# Altium PCB 20120404_ind_pcb_small.PcbDoc
Units mm, origin at the board's own origin, x right, y up, seen from the top; angles counter-clockwise.
Board outline 74 x 62 mm, 2 copper layers (Top, Bottom); 81 components, 72 nets, 218 pads, 104 vias.
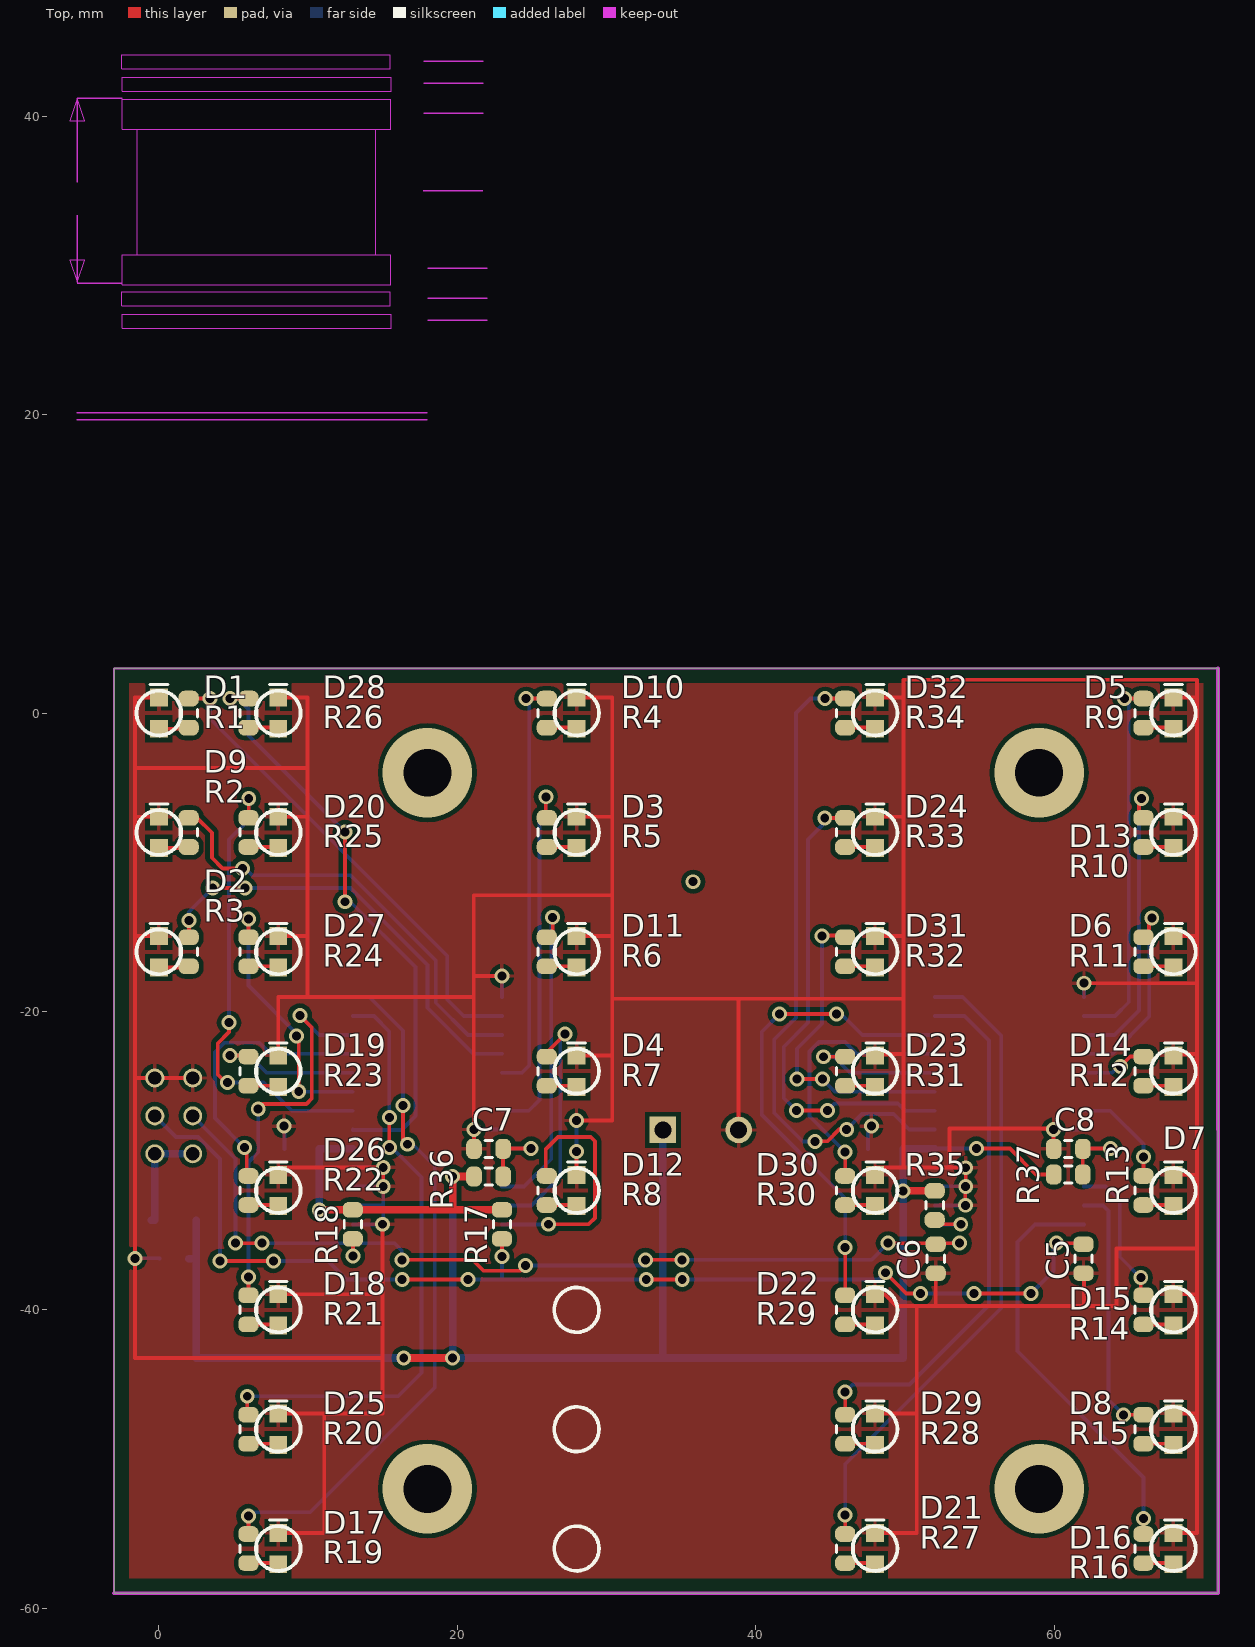
[diagram p0: Top view]
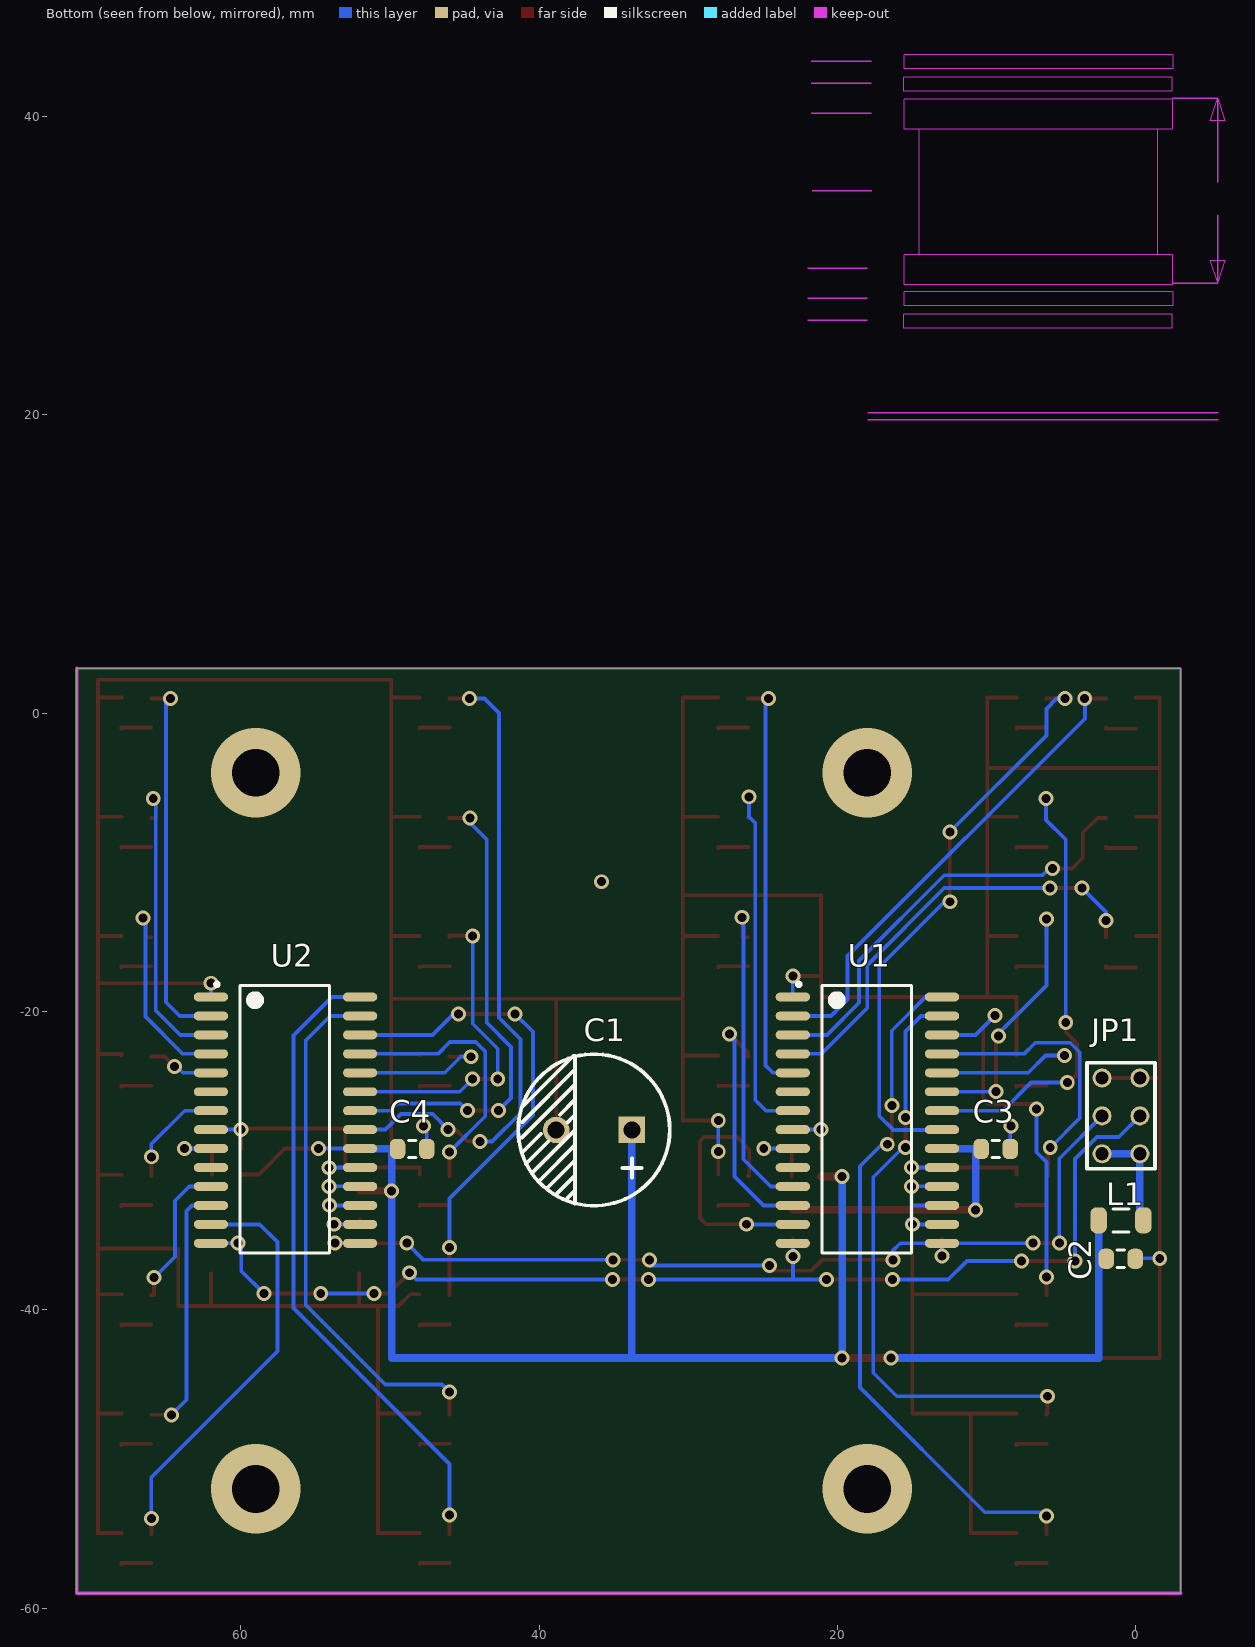
[diagram p1: Bottom view, seen from below]

## Layer stack, top to bottom
Top: signal copper 0.0356
Dielectric: core 0.32, FR-4, Dk 4.8
Bottom: signal copper 0.0356

## Board outline
-3,-59.001 71,-58.999 71,3 -3,3

## Design rules (kind name [scope] priority, off if disabled: settings)
Clearance Poly [InPolygonClass(MyPoly)] p1: gap=0.3
Clearance [All] p2: gap=0.178
Clearance Keepout [(All AND OnLayer('Keep-Out Layer'))] p3: gap=0
PlaneClearance [All] p1: clearance=0
PolygonConnect PolygonConnect_2 [IsPolygon And InNet('GND') And OnLayer('Top Layer, Top') vs IsVia] p1: connectstyle=Direct reliefconductorwidth=0 reliefentries=4 polygonreliefangle="90 Angle"
PolygonConnect PolygonConnect_1 [IsPolygon And InNet('GND') And OnLayer('Top Layer, Top') vs IsPad] p2: connectstyle=Direct reliefconductorwidth=0 reliefentries=4 polygonreliefangle="90 Angle"
PolygonConnect [All] p3: connectstyle=Relief reliefconductorwidth=0.254 reliefentries=4 polygonreliefangle="90 Angle"
RoutingVias [All] p1: holewidth=0.6 width=1 viastyle="Through Hole" minholewidth=0.6 minwidth=1 maxholewidth=0.6 maxwidth=1
SilkscreenOverComponentPads [All] p1: minsilkscreentomaskgap=0.254
SolderMaskExpansion [All] p1: expansion=0.102
Width [All] p1: maxlimit=2.54 minlimit=0.254 preferedwidth=0.254
26 further rules are at their usual default settings.

## Classes and differential pairs
polygon class MyPoly: GND

## Components (designator, comment, footprint, x,y, rotation, side; value= is the part's Value field where it differs from the comment)
C1 "100u" CEH12.5D10P5.0 36.322,-27.94 r0 bottom
C2 "10u" RC0805 1.016,-36.576 r180 bottom
C3 "100n" RC0805 9.398,-29.21 r180 bottom
C4 "100n" RC0805 48.514,-29.21 r180 bottom
C5 "100p" RC0805 61.976,-36.576 r270 top
C6 "100p" RC0805 52.07,-36.576 r270 top
C7 "33p" RC0805 22.098,-29.21 r180 top
C8 "33p" RC0805 60.96,-29.21 r180 top
D1 "RED" LED0805 0,0 r90 top
D2 "RED" LED0805 0,-16 r90 top
D3 "RED" LED0805 28,-8 r90 top
D4 "RED" LED0805 28,-24 r90 top
D5 "RED" LED0805 68,0 r90 top
D6 "RED" LED0805 68,-16 r90 top
D7 "RED" LED0805 68,-32 r90 top
D8 "RED" LED0805 68,-48 r90 top
D9 "RED" LED0805 0,-8 r90 top
D10 "RED" LED0805 28,0 r90 top
D11 "RED" LED0805 28,-16 r90 top
D12 "RED" LED0805 28,-32 r90 top
D13 "RED" LED0805 68,-8 r90 top
D14 "RED" LED0805 68,-24 r90 top
D15 "RED" LED0805 68,-40 r90 top
D16 "RED" LED0805 68,-56 r90 top
D17 "RED" LED0805 8,-56 r90 top
D18 "RED" LED0805 8,-40 r90 top
D19 "RED" LED0805 8,-24 r90 top
D20 "RED" LED0805 8,-8 r90 top
D21 "RED" LED0805 48,-56 r90 top
D22 "RED" LED0805 48,-40 r90 top
D23 "RED" LED0805 48,-24 r90 top
D24 "RED" LED0805 48,-8 r90 top
D25 "RED" LED0805 8,-48 r90 top
D26 "RED" LED0805 8,-32 r90 top
D27 "RED" LED0805 8,-16 r90 top
D28 "RED" LED0805 8,0 r90 top
D29 "RED" LED0805 48,-48 r90 top
D30 "RED" LED0805 48,-32 r90 top
D31 "RED" LED0805 48,-16 r90 top
D32 "RED" LED0805 48,0 r90 top
JP1 "Header 3X2 2.54mm" Pins2x3_2.54mm 1,-27 r0 bottom
L1 "BLM31PG601SN1" RC1206 1,-34 r180 bottom
R1 "510R" RC0805 2,0 r90 top
R2 "510R" RC0805 2,-8 r90 top
R3 "510R" RC0805 2,-16 r90 top
R4 "510R" RC0805 26,0 r90 top
R5 "510R" RC0805 26,-8 r90 top
R6 "510R" RC0805 26,-16 r90 top
R7 "510R" RC0805 26,-24 r90 top
R8 "510R" RC0805 26,-32 r90 top
R9 "510R" RC0805 66,0 r90 top
R10 "510R" RC0805 66,-8 r90 top
R11 "510R" RC0805 66,-16 r90 top
R12 "510R" RC0805 66,-24 r90 top
R13 "510R" RC0805 66,-32 r90 top
R14 "510R" RC0805 66,-40 r90 top
R15 "510R" RC0805 66,-48 r90 top
R16 "510R" RC0805 66,-56 r90 top
R17 "5.1k" RC0805 23,-34.27 r270 top
R18 "5.1k" RC0805 13,-34.27 r270 top
R19 "510R" RC0805 6,-56 r270 top
R20 "510R" RC0805 6,-48 r270 top
R21 "510R" RC0805 6,-40 r270 top
R22 "510R" RC0805 6,-32 r270 top
R23 "510R" RC0805 6,-24 r270 top
R24 "510R" RC0805 6,-16 r270 top
R25 "510R" RC0805 6,-8 r270 top
R26 "510R" RC0805 6,0 r270 top
R27 "510R" RC0805 46,-56 r270 top
R28 "510R" RC0805 46,-48 r270 top
R29 "510R" RC0805 46,-40 r270 top
R30 "510R" RC0805 46,-32 r270 top
R31 "510R" RC0805 46,-24 r270 top
R32 "510R" RC0805 46,-16 r270 top
R33 "510R" RC0805 46,-8 r270 top
R34 "510R" RC0805 46,0 r270 top
R35 "5.1k" RC0805 52,-33 r90 top
R36 "3k9" RC0805 22.098,-31.055 r0 top
R37 "3k9" RC0805 60.956,-30.921 r0 top
U1 "PartName" SO-28 23,-33 r180 bottom
U2 "PartName" SO-28 62,-33 r180 bottom

## Footprints (in the part's own frame and the unit in brackets; to place one, negate y for a bottom-side part, rotate by r counter-clockwise, add the part's x,y. Pads: shape width x height; smd on the part's side, far side on the other; paste and mask are expansions set on the pad)
CEH12.5D10P5.0 [mil] "Electrolytic capacitor 12.5x10x5 mm"
  rect 70x70 hole 45: 1(-100,0)
  round 70 hole 45: 2(100,0)
  silkscreen extent -200,-200 200,200, body extent -196,-196 196,196, height 492
LED0805 [mm] "Molded Diode, 2-Leads, Body 2.0x1.3mm, IPC Medium Density"
  rect 1.2x1.2 smd: 1(1.05,0) 2(-1.05,0)
  silkscreen extent 1.9,-0.6 1.9,0.6, body extent -1,-0.62 1,0.63, height 0.8
Pins2x3_2.54mm [mil] "Pins2x3_2.54mm"
  round 50 hole 35: 1(-50,100) 2(50,100) 3(-50,0) 4(50,0) 5(-50,-100) 6(50,-100)
  silkscreen extent -89,-140 90,139, body extent -89,-140 90,140, height 39
RC0805 [mm] "Chip Resistor, 2-Leads, Body 2.0x1.3mm, IPC Medium Density"
  rrect75% 1.05x1.35 smd: 1(-0.975,0) 2(0.975,0)
  silkscreen extent -0.25,-0.58 0.25,0.58, body extent -1.05,-0.67 1.05,0.67, height 0.6
RC1206 [mm] "Chip Resistor, 2-Leads, Body 3.1x1.6mm, IPC Medium Density"
  rrect75% 1.1x1.75 smd: 1(-1.5,0) 2(1.5,0)
  silkscreen extent -0.55,-0.77 0.55,0.77, body extent -1.6,-0.85 1.6,0.85, height 0.65
SO-28 [mm] "SOIC, 20-Leads, Body 13,0x7,6mm (max), Pitch 1,27mm, IPC Medium Density"
  oval 2.3x0.6 smd: 1(0,13.97) 2(0,12.7) 3(0,11.43) 4(0,10.16) 5(0,8.89) 6(0,7.62) 7(0,6.35) 8(0,5.08) 9(0,3.81) 10(0,2.54) 11(0,1.27) 12(0,0) 13(0,-1.27) 14(0,-2.54) 15(10,-2.54) 16(10,-1.27) 17(10,0) 18(10,1.27) 19(10,2.54) 20(10,3.81) 21(10,5.08) 22(10,6.35) 23(10,7.62) 24(10,8.89) 25(10,10.16) 26(10,11.43) 27(10,12.7) 28(10,13.97)
  silkscreen extent 0.28,-3.2 7.95,14.94, body extent 1.14,-3.2 8.75,14.75, height 2.65

## Part data
C1: library part CEH12.5D10P5.0M-50V-100U, "Electrolytic capacitor"
C2: library part CC0805K-X7R-16V0-10U0, "Chip capacitor, 20p"
C3 C4: library part CC0805K-X5R-50V0-100N, "Chip capacitor, 20p"
C5 C6: library part CC0805K-X5R-50V0-100P, "Chip capacitor, 20p"
C7 C8: library part CC0805K-X5R-50V0-33P0, "Chip capacitor, 20p"
D1 D2 D3 D4 D5 D6 D7 D8 D9 D10 D11 D12 D13 D14 D15 D16 D17 D18 D19 D20 D21 D22 D23 D24 D25 D26 D27 D28 D29 D30 D31 D32: library part HSMC-C170, "High Performance ChipLED / 0805"
L1: "Ferrite bead smd"
R1 R2 R3 R4 R5 R6 R7 R8 R9 R10 R11 R12 R13 R14 R15 R16 R19 R20 R21 R22 R23 R24 R25 R26 R27 R28 R29 R30 R31 R32 R33 R34: library part RC0805F-510R, "Chip resistor"
R17 R18 R35: library part RC0805F-5K10, "Chip resistor"
R36 R37: library part RC0805F-3K90, "Chip resistor"
U1 U2: library part MCP23016-I/SO, "16-Bit I2C™ I/O Expander"

## Via types
v1: diameter 1, hole 0.6, Top to Bottom, tented top, 100 vias
v2: diameter 6, hole 3.2, Top to Bottom, tented top, 4 vias

## Nets (pads, with @x,y where several pads share a name; then routed paths per layer and width w, separated by ;. In a path a pad name is that pad's centre, name@x,y a point inside that pad or via, vN(x,y) a via of type N, cw(c..) or ccw(c..) an arc to the next point about the centre after c; other vN are vias at no path point)
+5VD: C1.1 C2.1 C3.1 C4.1 L1.1 R17.1 R18.1 R35.2 R36.1 R37.1 U1.20 U2.20 | length 139.1
  Top w0.254: v1(54.791,-29.181) 54.842,-29.181 54.842,-29.19 57.048,-29.19 58.779,-30.921 R37.1
  Top w0.508: v1(10.747,-33.296) R18.1 19.688,-33.295 ; v1(16.412,-43.227) v1(19.688,-43.227) ; R36.1 21.123,-31.06 v1(19.688,-31.06) 19.688,-33.295 ; R17.1 19.688,-33.295 ; v1(49.889,-32.026) R35.2
  Bottom w0.254: C4.1@49.889,-29.282 C4.1@49.889,-29.19 ; U2.20 52,-29.181 v1(54.791,-29.181)
  Bottom w0.508: C2.1 2.5,-36.576 L1.1 2.5,-43.227 11.408,-43.227 v1(16.412,-43.227) ; v1(10.747,-33.296) 10.747,-29.19 U1.20 ; v1(19.688,-31.06) v1(19.688,-43.227) 36.478,-43.227 ; C1.1 33.782,-43.227 36.478,-43.227 ; C4.1@49.889,-29.282 v1(49.889,-32.026) 49.889,-43.227 36.478,-43.227 ; C4.1@49.889,-29.19 U2.20
+5VD_I2C: JP1.1 JP1.2 L1.2 | length 7.2
  Bottom w0.508: L1.2 -0.27,-34 JP1.1 JP1.2
CLK_1: C7.1 R36.2 U1.9 | length 5.7
  Top w0.254: R36.2 C7.1 23.073,-29.181 v1(24.946,-29.181)
  Bottom w0.254: U1.9 24.946,-29.19 v1(24.946,-29.181)
CLK_2: C8.1 R37.2 U2.9 | length 5.4
  Top w0.254: R37.2 61.931,-29.21 C8.1 61.935,-29.181 v1(63.783,-29.181)
  Bottom w0.254: U2.9 63.783,-29.19 v1(63.783,-29.181)
DGND: C1.2 C2.2 C3.2 C4.2 C5.2 C6.2 C7.2 C8.2 D1.1 D2.1 D3.1 D4.1 D5.1 D6.1 D7.1 D8.1 D9.1 D10.1 D11.1 D12.1 D13.1 D14.1 D15.1 D16.1 D17.1 D18.1 D19.1 D20.1 D21.1 D22.1 D23.1 D24.1 D25.1 D26.1 D27.1 D28.1 D29.1 D30.1 D31.1 D32.1 JP1.5 JP1.6 U1.1 U1.8 U1.16 U1.17 U1.18 U1.19 U2.1 U2.8 U2.17 U2.18 U2.19 | length 508.6
  Top w0.254: D2.1 -1.597,-14.95 ; D9.1 -1.597,-6.95 ; D1.1 -1.597,1.05 -1.597,-3.679 ; JP1.6 -1.597,-24.46 ; D17.1 11.078,-54.95 11.078,-46.95 ; D25.1 11.078,-46.95 ; D18.1 14.989,-38.95 ; D26.1 8,-30.46 v1@15.04,-30.46 ; D19.1 8,-19.03 9.96,-19.03 ; D27.1 9.96,-14.95 ; D20.1 9.96,-6.95 ; D28.1 9.96,1.05 9.96,-3.679 ; v1(14.989,-34.261) 14.989,-38.95 ; v1(15.04,-31.721) v1@15.04,-30.46 ; v1(15.04,-30.451) v1@15.04,-30.46 ; C7.2 21.123,-27.911 v1(21.111,-27.911) 21.111,-19.03 ; v1(22.99,-17.624) 21.111,-17.624 ; v1(27.994,-29.384) 28,-29.384 D12.1 ; v1(27.994,-27.301) 30.382,-27.301 30.382,-22.95 ; D4.1 30.382,-22.95 ; D11.1 30.382,-14.95 ; D3.1 30.382,-6.95 ; D10.1 30.382,1.05 30.382,-6.95 ; C1.2 38.856,-27.94 38.856,-19.148 ; D21.1 50.803,-54.95 50.803,-46.95 ; D29.1 50.803,-46.95 ; D22.1 48.638,-38.95 49.435,-39.747 50.803,-39.747 ; D30.1 48,-30.46 49.914,-30.46 ; D23.1 48,-22.856 49.914,-22.856 ; D31.1 49.914,-14.95 ; D24.1 49.914,-6.95 ; D32.1 49.914,1.05 ; C6.2 52.07,-39.747 ; v1(54.054,-32.991) 54.054,-31.721 v1(54.08,-31.721) v1(54.08,-30.476) v1@54.08,-30.46 ; C8.2 59.973,-29.21 v1(59.973,-27.911) 59.973,-27.835 53,-27.835 53,-30.451 54.08,-30.451 v1@54.08,-30.46 ; C5.2 62,-37.551 62,-39.747 ; v1(62.005,-18.106) 69.574,-18.106 ; D16.1 69.574,-54.95 69.574,-46.95 ; D8.1 69.574,-46.95 ; D15.1 69.574,-38.95 ; D7.1 69.574,-30.95 ; D14.1 68,-22.856 69.574,-22.856 ; D6.1 69.574,-14.95 ; D13.1 69.574,-6.95 ; D5.1 69.574,1.05 ; -1.597,-24.46 -1.597,-14.95 ; -1.597,-24.46 v1(-1.597,-36.547) -1.597,-43.227 14.989,-43.227 ; -1.597,-14.95 -1.597,-6.95 ; -1.597,-6.95 -1.597,-3.679 ; -1.597,-3.679 9.96,-3.679 ; 9.96,-19.03 21.111,-19.03 ; 9.96,-19.03 9.96,-14.95 ; 9.96,-14.95 9.96,-6.95 ; 9.96,-6.95 9.96,-3.679 ; 11.078,-46.95 14.989,-46.95 14.989,-43.227 ; 14.989,-43.227 14.989,-38.95 ; 21.111,-19.03 21.111,-17.624 ; 21.111,-17.624 21.111,-12.214 30.382,-12.214 ; 30.382,-22.95 30.382,-19.148 ; 30.382,-19.148 30.382,-14.95 ; 30.382,-19.148 38.856,-19.148 ; 30.382,-14.95 30.382,-12.214 ; 30.382,-12.214 30.382,-6.95 ; 38.856,-19.148 49.914,-19.148 ; 49.914,-30.46 v1@54.08,-30.46 ; 49.914,-30.46 49.914,-22.856 ; 49.914,-22.856 49.914,-19.148 ; 49.914,-19.148 49.914,-14.95 ; 49.914,-14.95 49.914,-6.95 ; 49.914,-6.95 49.914,1.05 ; 49.914,1.05 49.914,2.239 69.574,2.239 69.574,1.05 ; 50.803,-46.95 50.803,-39.747 ; 50.803,-39.747 52.07,-39.747 ; 52.07,-39.747 62,-39.747 ; 62,-39.747 64.196,-39.747 64.196,-35.886 69.574,-35.886 ; 69.574,-46.95 69.574,-38.95 ; 69.574,-38.95 69.574,-35.886 ; 69.574,-35.886 69.574,-30.95 ; 69.574,-30.95 69.574,-22.856 ; 69.574,-22.856 69.574,-18.106 ; 69.574,-18.106 69.574,-14.95 ; 69.574,-14.95 69.574,-6.95 ; 69.574,-6.95 69.574,1.05
  Bottom w0.254: v1(-1.597,-36.547) 0.041,-36.547 C2.2 ; v1@8.382,-27.94 8.423,-27.981 C3.2 ; U1.16 v1@14.989,-34.27 ; U1.17 15.04,-33 ; U1.18 13,-31.721 v1(15.04,-31.721) 15.04,-33 ; U1.19 15.04,-30.46 v1(15.04,-30.451) ; v1(14.989,-34.261) v1@14.989,-34.27 ; v1(21.111,-27.911) 23,-27.911 U1.8 ; v1(22.99,-17.624) 23,-17.624 U1.1 ; v1(27.994,-29.384) v1(27.994,-27.301) ; C4.2 47.539,-28.153 47.752,-27.94 v1(47.752,-27.686) ; U2.17 54.054,-33 v1(54.054,-32.991) ; U2.18 52,-31.721 v1(54.08,-31.721) ; U2.19 54.08,-30.46 v1(54.08,-30.476) ; v1(59.973,-27.911) 59.973,-27.92 U2.8 ; U2.1 62,-18.106 v1(62.005,-18.106) ; v1@14.989,-34.27 15.04,-34.27 15.04,-33
  other v1: 8.382,-27.686
MCU_SCL: C5.1 JP1.3 R17.2 U1.14 U2.14 | length 79.6
  Top w0.254: v1(4.093,-36.725) v1(7.674,-36.725) ; v1(16.31,-37.969) v1(20.73,-37.969) ; v1(22.99,-36.42) 22.99,-35.245 R17.2 ; v1(32.668,-37.969) v1(35.081,-37.969) ; v1(48.695,-37.512) 50.092,-38.909 v1(51.057,-38.909) ; v1(54.639,-38.909) v1(58.449,-38.909) ; v1(60.176,-35.531) 61.976,-35.531 C5.1
  Bottom w0.254: JP1.3 1.149,-28.419 2.619,-28.419 4.093,-29.892 v1(4.093,-36.725) ; v1(7.674,-36.725) 11.332,-36.725 12.576,-37.969 v1(16.31,-37.969) ; v1(20.73,-37.969) 22.99,-37.969 ; U1.14 23,-36.42 v1(22.99,-36.42) 22.99,-37.969 ; v1(32.668,-37.969) 22.99,-37.969 ; v1(35.081,-37.969) 48.238,-37.969 v1(48.695,-37.512) ; v1(51.057,-38.909) v1(54.639,-38.909) ; v1(58.449,-38.909) 59.973,-37.385 59.973,-35.531 v1(60.176,-35.531) 60.176,-35.54 U2.14
MCU_SDA: C6.1 JP1.4 R18.2 U1.15 U2.15 | length 64.2
  Top w0.254: v1(5.134,-35.531) v1(6.912,-35.531) ; R18.2 13.008,-35.245 v1(13.008,-36.394) ; v1(16.285,-36.648) 21.034,-36.648 21.771,-37.385 24.209,-37.385 v1(24.565,-37.029) ; v1(32.617,-36.648) v1(35.055,-36.648) ; v1(48.873,-35.531) C6.1@52.07,-35.531 ; v1(53.673,-35.531) C6.1@52.07,-35.531 ; C6.1@52.07,-35.531 C6.1 C6.1@52.07,-35.531
  Bottom w0.254: JP1.4 5.137,-29.867 5.137,-35.531 v1(5.134,-35.531) ; v1(6.912,-35.531) 13,-35.531 U1.15 ; v1(13.008,-36.394) 13,-36.394 U1.15 ; v1(16.285,-36.648) 16.275,-36.648 16.275,-36.013 15.802,-35.54 U1.15 ; v1(24.565,-37.029) 32.617,-37.029 v1(32.617,-36.648) ; v1(35.055,-36.648) 43.971,-36.648 47.755,-36.648 48.864,-35.54 48.873,-35.54 v1(48.873,-35.531) ; U2.15 53.673,-35.54 v1(53.673,-35.531)
NetD1_2: D1.2 R1.1 | length 2.1
  Top w0.254: D1.2 2,-1.05 R1.1
NetD2_2: D2.2 R3.1 | length 2.1
  Top w0.254: D2.2 2,-17.05 R3.1
NetD3_2: D3.2 R5.1 | length 2.1
  Top w0.254: R5.1 28,-8.975 D3.2
NetD4_2: D4.2 R7.1 | length 2.1
  Top w0.254: R7.1 28,-24.975 D4.2
NetD5_2: D5.2 R9.1 | length 2.1
  Top w0.254: R9.1 68,-0.975 D5.2
NetD6_2: D6.2 R11.1 | length 2.1
  Top w0.254: R11.1 68,-16.975 D6.2
NetD7_2: D7.2 R13.1 | length 2.1
  Top w0.254: R13.1 68,-32.975 D7.2
NetD8_2: D8.2 R15.1 | length 2.1
  Top w0.254: R15.1 68,-48.975 D8.2
NetD9_2: D9.2 R2.1 | length 2.1
  Top w0.254: D9.2 2,-9.05 R2.1
NetD10_2: D10.2 R4.1 | length 2.1
  Top w0.254: R4.1 28,-0.975 D10.2
NetD11_2: D11.2 R6.1 | length 2.1
  Top w0.254: R6.1 28,-16.975 D11.2
NetD12_2: D12.2 R8.1 | length 2.1
  Top w0.254: R8.1 28,-32.975 D12.2
NetD13_2: D13.2 R10.1 | length 2.1
  Top w0.254: R10.1 68,-8.975 D13.2
NetD14_2: D14.2 R12.1 | length 2.1
  Top w0.254: R12.1 68,-24.975 D14.2
NetD15_2: D15.2 R14.1 | length 2.1
  Top w0.254: R14.1 68,-40.975 D15.2
NetD16_2: D16.2 R16.1 | length 2.1
  Top w0.254: R16.1 68,-56.975 D16.2
NetD17_2: D17.2 R19.2 | length 2.1
  Top w0.254: R19.2 8,-56.975 D17.2
NetD18_2: D18.2 R21.2 | length 2.1
  Top w0.254: R21.2 8,-40.975 D18.2
NetD19_2: D19.2 R23.2 | length 2.1
  Top w0.254: R23.2 8,-24.975 D19.2
NetD20_2: D20.2 R25.2 | length 2.1
  Top w0.254: R25.2 8,-8.975 D20.2
NetD21_2: D21.2 R27.2 | length 2.1
  Top w0.254: R27.2 48,-56.975 D21.2
NetD22_2: D22.2 R29.2 | length 2.1
  Top w0.254: R29.2 48,-40.975 D22.2
NetD23_2: D23.2 R31.2 | length 2.1
  Top w0.254: R31.2 48,-24.975 D23.2
NetD24_2: D24.2 R33.2 | length 2.1
  Top w0.254: R33.2 48,-8.975 D24.2
NetD25_2: D25.2 R20.2 | length 2.1
  Top w0.254: R20.2 8,-48.975 D25.2
NetD26_2: D26.2 R22.2 | length 2.1
  Top w0.254: R22.2 8,-32.975 D26.2
NetD27_2: D27.2 R24.2 | length 2.1
  Top w0.254: R24.2 8,-16.975 D27.2
NetD28_2: D28.2 R26.2 | length 2.1
  Top w0.254: R26.2 8,-0.975 D28.2
NetD29_2: D29.2 R28.2 | length 2.1
  Top w0.254: R28.2 48,-48.975 D29.2
NetD30_2: D30.2 R30.2 | length 2.1
  Top w0.254: R30.2 48,-32.975 D30.2
NetD31_2: D31.2 R32.2 | length 2.1
  Top w0.254: R32.2 48,-16.975 D31.2
NetD32_2: D32.2 R34.2 | length 2.1
  Top w0.254: R34.2 48,-0.975 D32.2
NetR1_2: R1.2 U1.2 | length 32.3
  Top w0.254: R1.2 2,0.969 v1(3.432,0.969)
  Bottom w0.254: v1(3.432,0.969) 3.432,0.975 3.423,0.975 3.423,-0.377 19.323,-16.278 19.323,-19.189 20.434,-20.3 U1.2
NetR2_2: R2.2 U1.3 | length 29.7
  Top w0.254: R2.2 2.562,-7.025 3.559,-8.023 3.559,-9.699 4.27,-10.41 v1(5.591,-10.41)
  Bottom w0.254: v1(5.591,-10.41) 5.794,-10.41 6.252,-10.867 12.846,-10.867 18.561,-16.582 18.561,-19.418 20.713,-21.57 U1.3
NetR3_2: R3.2 U1.4 | length 29.6
  Top w0.254: R3.2 2.01,-15.025 v1(2.01,-13.89) ; v1(3.61,-11.731) v1(5.769,-11.731)
  Bottom w0.254: v1(2.01,-13.89) 2,-13.89 2,-13.341 v1(3.61,-11.731) ; v1(5.769,-11.731) 12.846,-11.731 18.003,-16.887 18.003,-19.748 21.094,-22.84 U1.4
NetR4_2: R4.2 U1.5 | length 28.2
  Top w0.254: v1(24.616,0.969) 26,0.969 R4.2
  Bottom w0.254: U1.5 24.336,-24.11 24.819,-23.627 24.819,0.975 24.616,0.975 v1(24.616,0.969)
NetR5_2: R5.2 U1.7 | length 24.8
  Top w0.254: v1(25.937,-5.61) 25.937,-7.025 R5.2
  Bottom w0.254: U1.7 24.794,-26.65 25.514,-25.93 25.514,-7.362 25.926,-6.951 25.926,-5.61 v1(25.937,-5.61)
NetR6_2: R6.2 U1.11 | length 22.1
  Top w0.254: R6.2 26.394,-15.025 v1(26.394,-13.687)
  Bottom w0.254: U1.11 24.48,-31.73 26.301,-29.908 26.301,-13.788 26.398,-13.691 v1(26.394,-13.687)
NetR7_2: R7.2 U1.12 | length 16.4
  Top w0.254: R7.2 26,-22.742 v1(27.232,-21.51)
  Bottom w0.254: U1.12 24.971,-33 26.902,-31.07 26.902,-21.84 v1(27.232,-21.51)
NetR8_2: R8.2 U1.13 | length 17.2
  Top w0.254: R8.2 25.924,-31.025 25.924,-29.244 26.749,-28.419 28.946,-28.419 29.226,-28.698 29.226,-33.842 28.807,-34.261 v1(26.114,-34.261)
  Bottom w0.254: U1.13 26.114,-34.27 v1(26.114,-34.261)
NetR9_2: R9.2 U2.2 | length 25.3
  Top w0.254: v1(64.722,0.969) 66,0.969 R9.2
  Bottom w0.254: U2.2 64.087,-20.3 65.011,-19.376 65.011,0.975 64.722,0.975 v1(64.722,0.969)
NetR10_2: R10.2 U2.3 | length 20.6
  Top w0.254: v1(65.865,-5.711) 65.688,-5.711 65.688,-7.025 R10.2
  Bottom w0.254: U2.3 64.062,-21.57 65.697,-19.935 65.697,-5.711 v1(65.865,-5.711)
NetR11_2: R11.2 U2.4 | length 14
  Top w0.254: R11.2 66.373,-15.025 66.373,-13.738 v1(66.551,-13.738)
  Bottom w0.254: U2.4 63.884,-22.84 66.383,-20.342 66.383,-13.738 v1(66.551,-13.738)
NetR12_2: R12.2 U2.5 | length 4.4
  Top w0.254: v1(64.443,-23.694) 65.112,-23.025 R12.2
  Bottom w0.254: U2.5 63.884,-24.11 64.3,-23.694 v1(64.443,-23.694)
NetR13_2: R13.2 U2.7 | length 7.1
  Top w0.254: v1(65.992,-29.74) 65.992,-31.025 R13.2
  Bottom w0.254: U2.7 63.757,-26.65 66,-28.893 66,-29.74 v1(65.992,-29.74)
NetR14_2: R14.2 U2.11 | length 9.9
  Top w0.254: v1(65.815,-37.842) 65.815,-39.025 R14.2
  Bottom w0.254: U2.11 63.452,-31.73 64.408,-32.686 64.408,-36.445 65.805,-37.842 v1(65.815,-37.842)
NetR15_2: R15.2 U2.12 | length 17.3
  Top w0.254: v1(64.646,-47.037) 66,-47.037 R15.2
  Bottom w0.254: U2.12 63.275,-33 63.646,-33.372 63.646,-46.021 64.65,-47.025 64.65,-47.037 v1(64.646,-47.037)
NetR16_2: R16.2 U2.13 | length 28
  Top w0.254: v1(65.992,-53.971) 65.992,-55.025 R16.2
  Bottom w0.254: U2.13 58.728,-34.27 57.543,-35.455 57.543,-42.77 66,-51.226 66,-53.971 v1(65.992,-53.971)
NetR19_1: R19.1 U1.28 | length 46.8
  Top w0.254: v1(5.998,-53.819) 5.998,-55.025 R19.1 ; v1(16.361,-26.311) 16.361,-28.647 16.615,-28.901 v1(16.666,-28.901)
  Bottom w0.254: v1(5.998,-53.819) 5.998,-53.565 10.138,-53.565 18.494,-45.208 18.494,-30.375 17.021,-28.901 v1(16.666,-28.901) ; U1.28 14.1,-19.03 16.361,-21.291 v1(16.361,-26.311)
NetR20_1: R20.1 U1.27 | length 40.4
  Top w0.254: v1(5.921,-45.792) 5.921,-46.961 6,-46.961 R20.1 ; v1(15.446,-29.13) v1(15.446,-27.098)
  Bottom w0.254: v1(5.921,-45.792) 16.031,-45.792 17.605,-44.218 17.605,-31.111 15.624,-29.13 v1(15.446,-29.13) ; U1.27 14.414,-20.3 15.446,-21.332 v1(15.446,-27.098)
NetR21_1: R21.1 U1.26 | length 26.6
  Top w0.254: v1(5.998,-37.791) 5.998,-39.025 R21.1 ; v1(6.658,-26.539) 6.988,-26.209 9.884,-26.209 10.239,-25.853 10.239,-21.053 v1(9.452,-20.265)
  Bottom w0.254: v1(5.998,-37.791) 6,-37.791 6,-30.093 6.658,-29.435 v1(6.658,-26.539) ; v1(9.452,-20.265) 9.447,-20.27 10.747,-21.57 U1.26
NetR22_1: R22.1 U1.25 | length 19.3
  Top w0.254: v1(5.744,-29.13) 5.591,-29.13 5.591,-29.232 5.896,-29.536 5.896,-31.025 R22.1
  Bottom w0.254: v1(5.744,-29.13) 3.762,-27.149 3.762,-22.729 4.397,-22.094 6.75,-22.094 7.496,-22.84 U1.25
NetR23_1: R23.1 U1.24 | length 10.4
  Top w0.254: v1(4.778,-22.958) 6,-22.958 R23.1
  Bottom w0.254: v1(4.778,-22.958) 4.575,-22.958 4.575,-22.959 6.066,-22.959 7.217,-24.11 U1.24
NetR24_1: R24.1 U1.23 | length 18.2
  Top w0.254: v1(5.998,-13.788) 5.998,-15.025 R24.1 ; v1(9.223,-21.637) 9.376,-21.637 v1(9.376,-25.371)
  Bottom w0.254: v1(5.998,-13.788) 6,-13.788 6,-18.261 9.376,-21.637 v1(9.223,-21.637) ; v1(9.376,-25.371) 9.376,-25.38 U1.23
NetR25_1: R25.1 U1.22 | length 30.7
  Top w0.254: v1(4.601,-24.761) 4.474,-24.761 3.94,-24.228 3.94,-22.145 4.702,-21.383 v1(4.702,-20.748) ; R25.1 6.023,-7.025 v1(6.023,-5.737)
  Bottom w0.254: v1(4.601,-24.761) 7.03,-24.761 8.919,-26.65 10.925,-26.65 U1.22 ; v1(4.702,-20.748) 4.702,-8.48 6.023,-7.159 v1(6.023,-5.737)
NetR26_1: R26.1 U1.21 | length 39.5
  Top w0.254: v1(4.753,0.969) 6,0.969 R26.1 ; v1(12.475,-12.645) v1(12.475,-7.972)
  Bottom w0.254: v1(4.753,0.969) 5.314,0.969 6,0.283 6,-1.497 v1(12.475,-7.972) ; v1(12.475,-12.645) 12.83,-12.645 17.208,-17.023 17.208,-26.996 16.285,-27.92 16.285,-27.936 13,-27.936 U1.21
NetR27_1: R27.1 U2.28 | length 43.3
  Top w0.254: R27.1 46.003,-55.025 v1(46.003,-53.743)
  Bottom w0.254: v1(46.003,-53.743) 46,-53.743 46,-50.332 56.458,-39.874 56.458,-21.612 53.877,-19.03 U2.28
NetR28_1: R28.1 U2.27 | length 35.6
  Top w0.254: R28.1 46.003,-47.025 v1(46.003,-45.513)
  Bottom w0.254: v1(46.003,-45.513) 46.511,-45.005 50.311,-45.005 55.645,-39.671 55.645,-21.942 54.004,-20.3 U2.27
NetR29_1: R29.1 U2.26 | length 32.6
  Top w0.254: v1(41.608,-20.164) v1(45.418,-20.164) ; R29.1 46.003,-39.025 v1(46.003,-35.81)
  Bottom w0.254: v1(41.608,-20.164) 40.415,-21.358 40.415,-26.946 46,-32.531 46,-35.81 v1(46.003,-35.81) ; v1(45.418,-20.164) 45.739,-20.164 47.146,-21.57 U2.26
NetR30_1: R30.1 U2.25 | length 18.3
  Top w0.254: R30.1 46.003,-31.025 v1(46.003,-29.409)
  Bottom w0.254: v1(46.003,-29.409) 43.615,-27.022 43.615,-22.678 44.25,-22.043 45.993,-22.043 46.79,-22.84 U2.25
NetR31_1: R31.1 U2.24 | length 9.4
  Top w0.254: v1(44.555,-23.034) 46,-23.034 R31.1
  Bottom w0.254: v1(44.555,-23.034) 44.555,-23.025 45.257,-23.025 45.257,-23.034 46.333,-24.11 U2.24
NetR32_1: R32.1 U2.23 | length 21.9
  Top w0.254: v1(42.777,-24.533) v1(44.479,-24.533) ; v1(44.453,-14.931) 44.275,-14.931 44.301,-14.906 46,-14.906 R32.1
  Bottom w0.254: v1(42.777,-24.533) 42.777,-22.501 44.453,-20.824 v1(44.453,-14.931) ; v1(44.479,-24.533) 44.474,-24.537 45.317,-25.38 47.323,-25.38 U2.23
NetR33_1: R33.1 U2.22 | length 32.2
  Top w0.254: v1(42.726,-26.641) v1(44.809,-26.641) ; v1(44.631,-7.032) 46,-7.032 R33.1
  Bottom w0.254: v1(42.726,-26.641) 41.888,-25.803 41.888,-22.374 43.513,-20.748 43.513,-8.48 44.618,-7.375 44.618,-7.025 44.631,-7.025 v1(44.631,-7.032) ; v1(44.809,-26.641) 45.288,-26.162 49.53,-26.162 50.018,-26.65 U2.22
NetR34_1: R34.1 U2.21 | length 43.9
  Top w0.254: v1(43.971,-28.724) 43.971,-28.698 44.809,-28.698 45.596,-27.911 v1(46.104,-27.911) ; v1(44.656,0.969) 46,0.969 R34.1
  Bottom w0.254: v1(43.971,-28.724) 43.158,-28.724 41.253,-26.819 41.253,-21.866 42.701,-20.418 42.701,0.004 43.672,0.975 44.656,0.975 v1(44.656,0.969) ; v1(46.104,-27.911) 47.134,-26.881 49.253,-26.881 50.292,-27.92 U2.21
NetR35_1: R35.1 U2.16 | length 3.8
  Top w0.254: R35.1 52,-34.261 v1(53.75,-34.261)
  Bottom w0.254: U2.16 53.75,-34.27 v1(53.75,-34.261)
pads on no net: U1.6 U1.10 U2.6 U2.10
copper on no net:
  other v1: 35.814,-11.303
  other v2: 18,-52 59,-52 18,-4 59,-4

## Polygon pours and split planes (outlines as drawn)
DGND on Top "GND" (solid, pour order 8): -2,2 -2,-58 70,-58 70,2

## Keep-outs
Keep-Out Layer, Board:
  region: -5.47,41.203 -5.97,39.703 -4.97,39.703
  region: -5.47,28.866 -4.97,30.366 -5.97,30.366
  lines w0.025: -2.495,28.237 -2.495,27.297 15.513,27.297 15.513,28.237 -2.47,28.237 ; -2.495,44.133 -2.495,43.193 15.513,43.193 15.513,44.133 -2.47,44.133 ; -2.47,30.726 -2.47,28.72 15.539,28.72 15.539,30.726 -2.445,30.726 ; -2.47,41.136 -2.47,39.129 15.539,39.129 15.539,41.136 -2.445,41.136 ; -2.445,26.739 -2.445,25.799 15.564,25.799 15.564,26.739 -2.419,26.739 ; -2.445,42.634 -2.445,41.695 15.564,41.695 15.564,42.634 -2.419,42.634 ; -1.454,39.129 -1.454,32.225 -1.454,30.726 14.523,30.726 14.523,37.901 ; -1.429,39.129 14.523,39.129 14.523,37.631
  lines w0.1: -5.511,19.646 17.989,19.646 ; -5.511,20.146 17.989,20.146 ; -5.47,28.815 -2.47,28.815 ; -5.47,28.866 -5.47,33.379 ; -5.47,35.568 -5.47,41.203 -2.47,41.203 ; 17.706,35.009 21.706,35.009 ; 17.757,40.203 21.757,40.203 ; 17.757,42.203 21.757,42.203 ; 17.757,43.703 21.757,43.703 ; 18.007,26.315 22.007,26.315 ; 18.007,27.815 22.007,27.815 ; 18.007,29.815 22.007,29.815
  lines w0.127: -3,-59.001 -3,3 71,3
  lines w0.254: -3,-59.001 71,-58.999 71,3
  text "TOP -SILKSREEN" at 22.257,43.203 h1.02
  text "TOP -SOLDERMASK" at 22.257,41.703 h1.02
  text "35 uM PLATED to 53 uM" at 22.257,39.703 h1.02
  text "Layer 1-TOP" at -1.911,39.612 h1.02
  text "THICKNESS TBD BY  VENDER" at 22.206,34.509 h1.02
  text "1.5mm" at -7.185,33.989 h1.02
  text "Layer 2 - BOTTOM" at -1.97,29.315 h1.02
  text "35 uM PLATED to 53 uM" at 22.257,29.315 h1.02
  text "BOTTOM -SOLDERMASK" at 22.507,27.315 h1.02
  text "BOTTOM -SILKSREEN" at 22.507,25.815 h1.02
  text "DETAIL \"A\"" at 3.489,20.646 h1.02
  text "NOT TO SCALE" at 3.489,17.646 h1.02

## Silkscreen, mask and mechanical layers (free items; w line width, h text height)
Top Overlay, Top Silk:
  circle w0.254: c68,0 r1.5
  circle w0.254: c68,-8 r1.5
  circle w0.254: c68,-16 r1.5
  circle w0.254: c68,-24 r1.5
  circle w0.254: c68,-56 r1.5
  circle w0.254: c68,-48 r1.5
  circle w0.254: c68,-40 r1.5
  circle w0.254: c68,-32 r1.5
  circle w0.254: c48,0 r1.5
  circle w0.254: c48,-8 r1.5
  circle w0.254: c48,-16 r1.5
  circle w0.254: c48,-24 r1.5
  circle w0.254: c48,-56 r1.5
  circle w0.254: c48,-48 r1.5
  circle w0.254: c48,-40 r1.5
  circle w0.254: c48,-32 r1.5
  circle w0.254: c28,0 r1.5
  circle w0.254: c28,-8 r1.5
  circle w0.254: c28,-16 r1.5
  circle w0.254: c28,-24 r1.5
  circle w0.254: c28,-56 r1.5
  circle w0.254: c28,-48 r1.5
  circle w0.254: c28,-40 r1.5
  circle w0.254: c28,-32 r1.5
  circle w0.254: c8,-32 r1.5
  circle w0.254: c8,-40 r1.5
  circle w0.254: c8,-48 r1.5
  circle w0.254: c8,-56 r1.5
  circle w0.254: c8,-24 r1.5
  circle w0.254: c8,-16 r1.5
  circle w0.254: c8,-8 r1.5
  circle w0.254: c8,0 r1.5
  circle w0.254: c0,-16 r1.5
  circle w0.254: c0,-8 r1.5
  circle w0.254: c0,0 r1.5

## Dimensions
-3,3 to 71,3 on Keep-Out Layer, Board
-3,3 to -3,-59.001 on Keep-Out Layer, Board